# EAGLE board BMS Segment rev15 (EAGLE 9.6.2), part 1 of 2
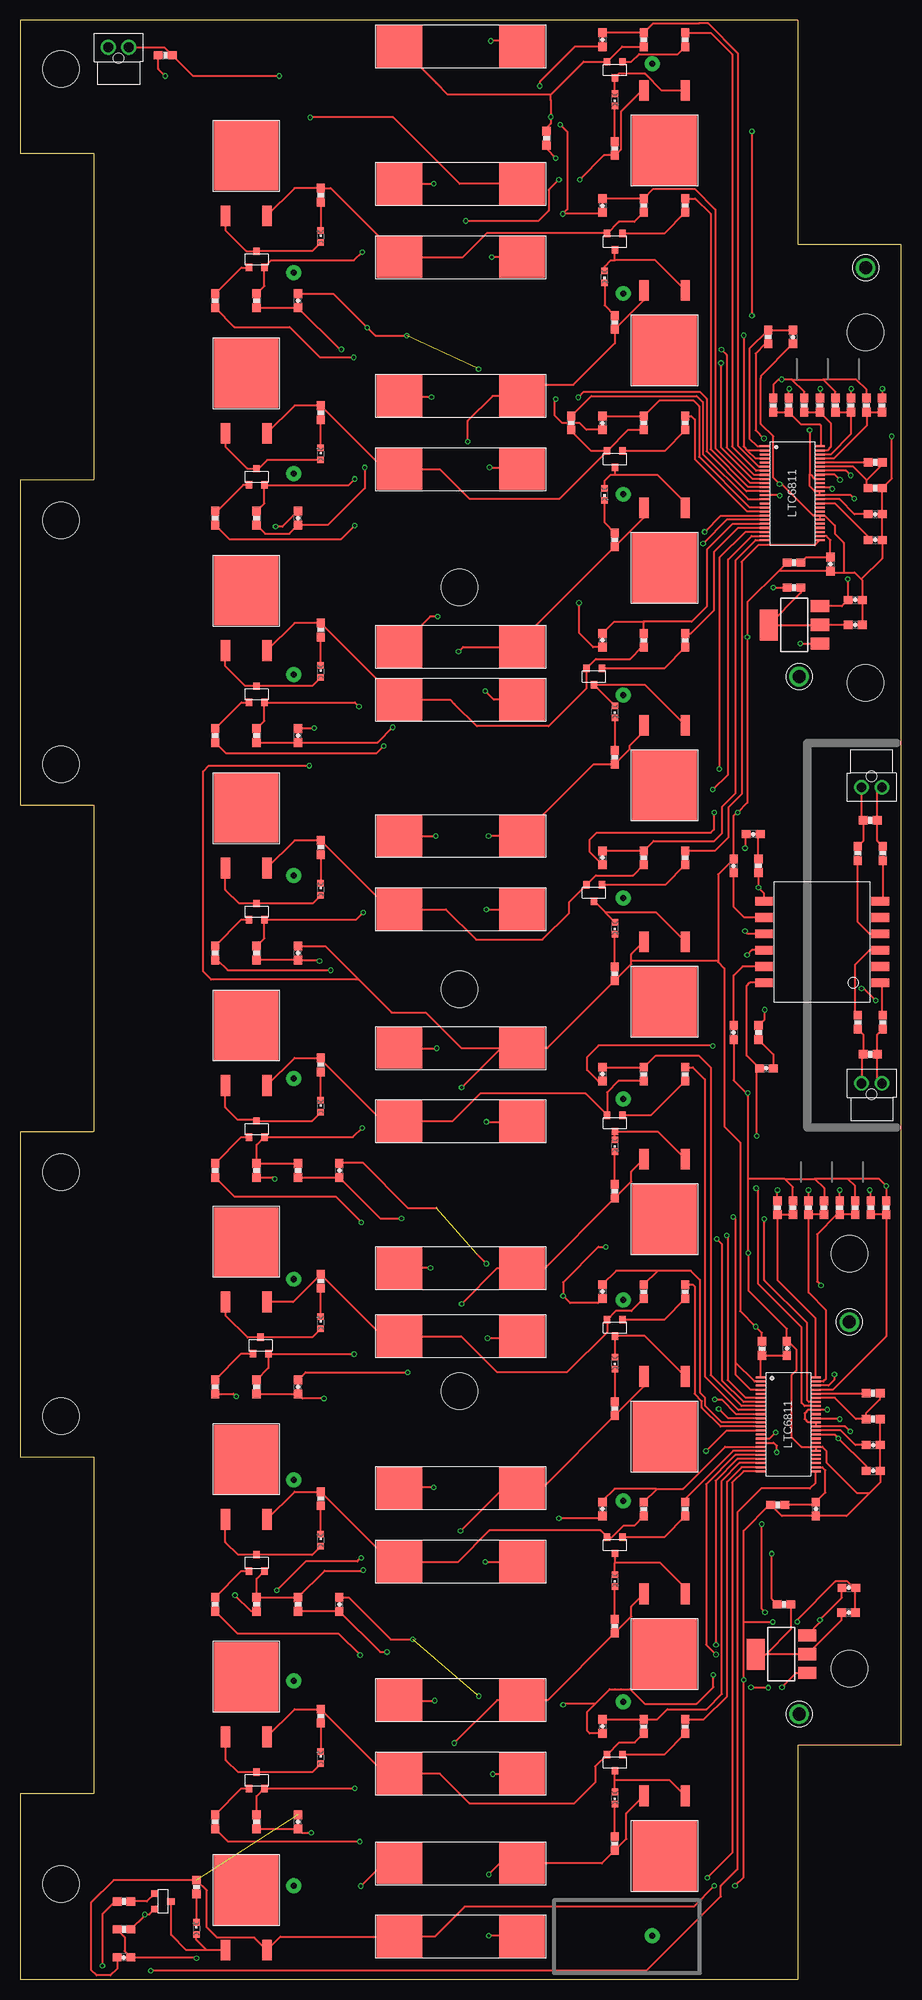
[diagram p0: board, top side]
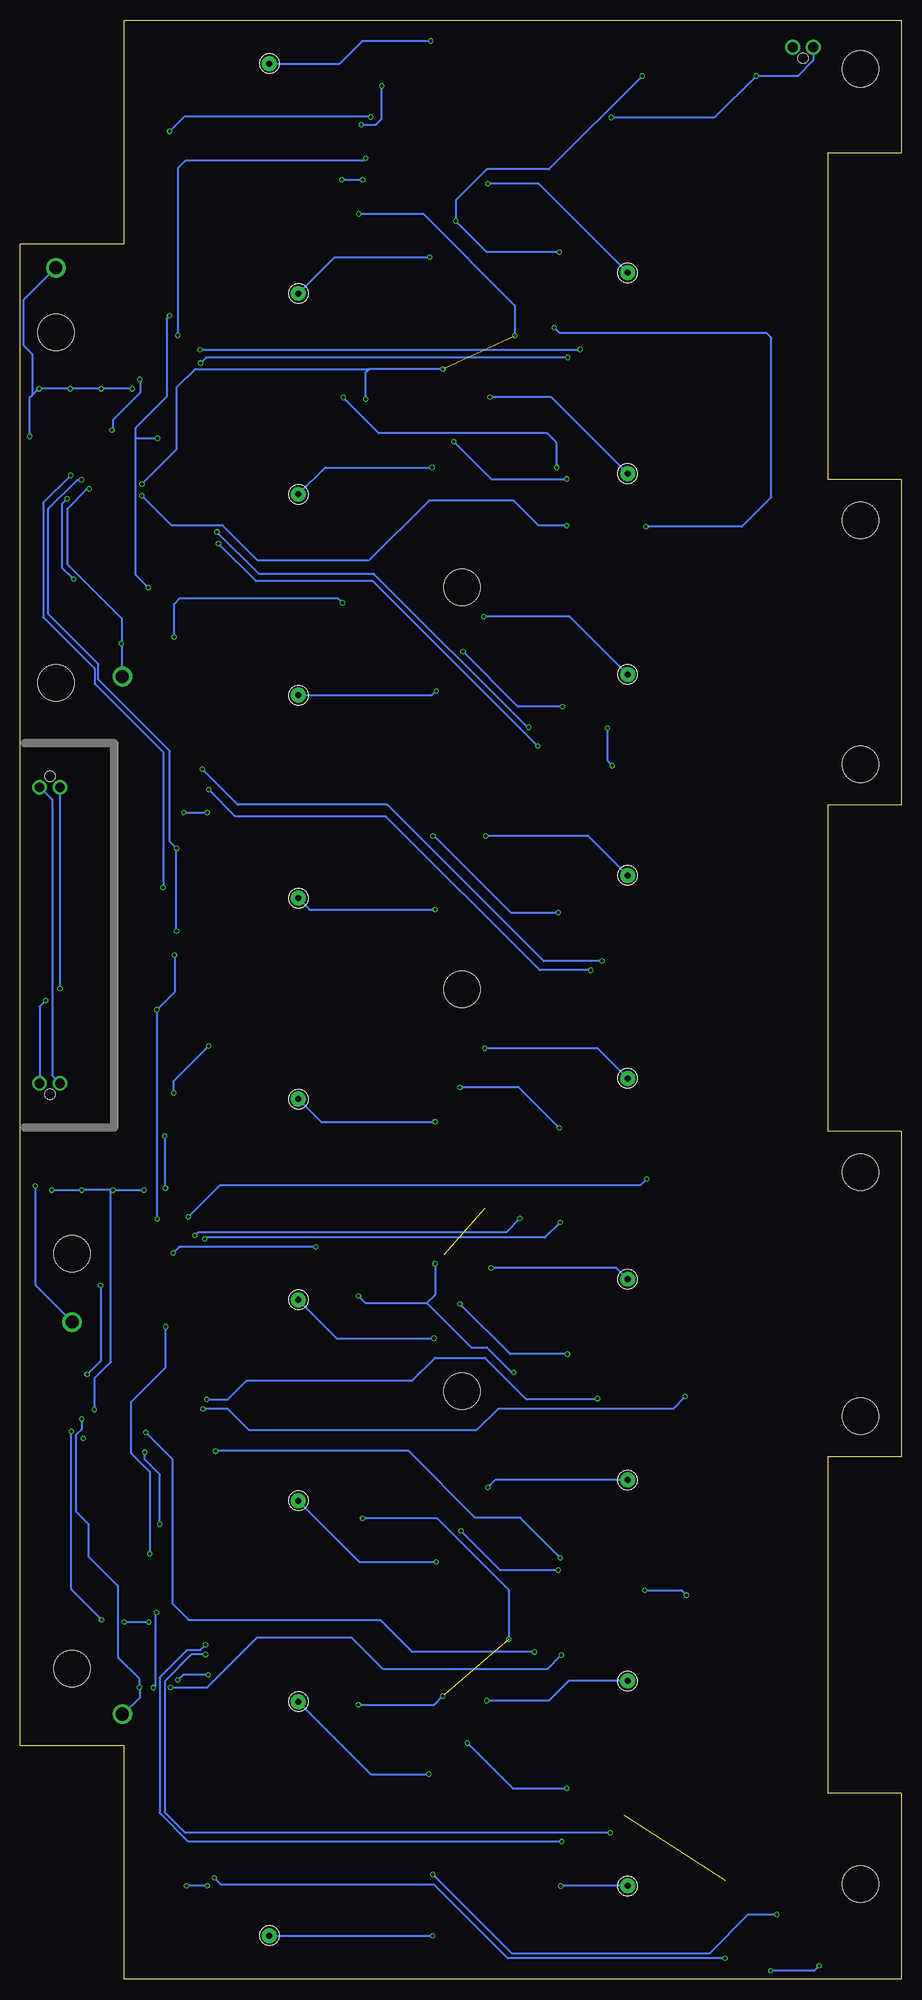
[diagram p1: board, bottom side, seen from below]

Size 108 x 240.25 mm. Coordinates in mm from the lower left corner, seen from the top.
Outline: 9,223.93 9,183.93 0,183.93 0,143.99 9,143.99 9,103.99 0,103.99 0,64.05 9,64.05 9,22.77 0,22.77 0,0 95.3,0 95.3,28.7 108,28.7 108,212.82 95.3,212.82 95.3,240.25 0,240.25 0,223.93 9,223.93
Copper layers (1*16): Top 0.035mm / dielectric 1.5mm / Bottom 0.035mm
Design rules "Advanced Circuits (2 Layer) *": minimum track width 5mil, minimum drill 10mil, track to track 5mil, track to pad 5mil, pad to pad 5mil, via to via 5mil, smd to smd 5mil, copper to edge 10mil, drill to drill 6mil, minimum pad ring 7mil, minimum via ring 5mil, stop-mask expansion 2.5mil, vias tented up to drill 30mil, thermal gap 10mil
Net classes: 1 unfused_hv: clearance 0.025 mm to class 0, clearance 3.2 mm

## Footprints (pad centres in the part's own frame; a part is rotated, then mirrored left to right if it is on the bottom)
NANO-FIT_VERTICAL-2 = drill 1.2: P$1 -1.25,0; P$2 1.25,0 | hole 1.3: 0,-1.34
0603-CAP = smd 1.1 x 1: 1 -0.85,0; 2 0.85,0
CONTACT_SPRING = drill 0.737 pad 1.829: P$1 0,0
PWR163 = smd 1.143 x 2.54: 1 -2.54,-7.366; 2 2.54,-7.366 | smd 7.874 x 8.509: PAD 0,0
0603-RES = smd 1.1 x 1: 1 -0.85,0; 2 0.85,0
LED-603 = smd 0.8 x 0.8: A 0,-0.75; C 0,0.75
SOT23 = smd 0.8 x 0.9: 1 -0.95,-1; 2 0.95,-1; 3 0,1
5X20MM_FUSE = smd 5.588 x 5.08: P$1 -7.493,0; P$2 7.493,0
SOT223 = smd 1.5 x 2.235: 1 -2.3,-3.15; 2 0,-3.15; 3 2.3,-3.15 | smd 3.8 x 2.2: 4 0,3.15
HM2102NLT = smd 1.067 x 2.184: P$1 0,0; P$2 2,0; P$3 4,0; P$4 6,0; P$5 8,0; P$6 10,0; P$7 10,14.25; P$8 8,14.25; P$9 6,14.25; P$10 4,14.25; P$11 2,14.25; P$12 0,14.25
LTC6811 = smd 0.25 x 1.25: 1 -5.75,-3.37; 2 -5.25,-3.37; 3 -4.75,-3.37; 4 -4.25,-3.37; 5 -3.75,-3.37; 6 -3.25,-3.37; 7 -2.75,-3.37; 8 -2.25,-3.37; 9 -1.75,-3.37; 10 -1.25,-3.37; 11 -0.75,-3.37; 12 -0.25,-3.37; 13 0.25,-3.37; 14 0.75,-3.37; 15 1.25,-3.37; 16 1.75,-3.37; 17 2.25,-3.37; 18 2.75,-3.37; 19 3.25,-3.37; 20 3.75,-3.37; 21 4.25,-3.37; 22 4.75,-3.37; 23 5.25,-3.37; 24 5.75,-3.37; 25 5.75,3.38; 26 5.25,3.38; 27 4.75,3.38; 28 4.25,3.38; 29 3.75,3.38; 30 3.25,3.38; 31 2.75,3.38; 32 2.25,3.38; 33 1.75,3.38; 34 1.25,3.38; 35 0.75,3.38; 36 0.25,3.38; 37 -0.25,3.38; 38 -0.75,3.38; 39 -1.25,3.38; 40 -1.75,3.38; 41 -2.25,3.38; 42 -2.75,3.38; 43 -3.25,3.38; 44 -3.75,3.38; 45 -4.25,3.38; 46 -4.75,3.38; 47 -5.25,3.38; 48 -5.75,3.38
TEST_POINT = drill 1.6: P$1 0,0
M4_MOUNTING = hole 4.5: 0,0

## Placement (x,y rotation side)
AMS_CELL_TEST  AMS_CELL_TEST  [NANO-FIT_VERTICAL-2]  12.03,236.95 0 top
C1_A  1uF  [0603-CAP]  104.82,176.52 0 top
C1_B  1uF  [0603-CAP]  104.56,62.34 0 top
C2_A  1uF  [0603-CAP]  104.82,179.69 0 top
C2_B  1uF  [0603-CAP]  104.56,65.52 0 top
C3_A  15pF  [0603-CAP]  89.87,140.45 180 top
C3_B  15pF  [0603-CAP]  91.49,111.7 180 top
C4_A  10nF  [0603-CAP]  87.46,136.55 90 top
C4_B  10nF  [0603-CAP]  87.46,116.11 270 top
C5_A  10nF  [0603-CAP]  99.33,173.54 270 top
C6_A  100nF  [0603-CAP]  94.74,201.42 270 top
C6_B  100nF  [0603-CAP]  93.98,77.34 90 top
C7_A  100nF  [0603-CAP]  102.36,166.12 0 top
C7_B  100nF  [0603-CAP]  101.55,44.96 0 top
C8_A  1uF  [0603-CAP]  102.36,169.16 0 top
C8_B  1uF  [0603-CAP]  101.6,48.01 0 top
C_5  10nF  [0603-CAP]  97.54,57.66 270 top
CELL0  BATTERY_SPRING_SPRING_CONTACT  [CONTACT_SPRING]  77.47,5.33 270 bottom
CELL1  BATTERY_SPRING_SPRING_CONTACT  [CONTACT_SPRING]  33.53,11.43 270 bottom
CELL2  BATTERY_SPRING_SPRING_CONTACT  [CONTACT_SPRING]  73.91,34.04 270 bottom
CELL3  BATTERY_SPRING_SPRING_CONTACT  [CONTACT_SPRING]  33.53,36.58 270 bottom
CELL4  BATTERY_SPRING_SPRING_CONTACT  [CONTACT_SPRING]  73.91,58.67 270 bottom
CELL5  BATTERY_SPRING_SPRING_CONTACT  [CONTACT_SPRING]  33.53,61.21 270 bottom
CELL6  BATTERY_SPRING_SPRING_CONTACT  [CONTACT_SPRING]  73.91,83.31 270 bottom
CELL7  BATTERY_SPRING_SPRING_CONTACT  [CONTACT_SPRING]  33.53,85.85 270 bottom
CELL8  BATTERY_SPRING_SPRING_CONTACT  [CONTACT_SPRING]  73.91,107.95 270 bottom
CELL9  BATTERY_SPRING_SPRING_CONTACT  [CONTACT_SPRING]  33.53,110.49 270 bottom
CELL10  BATTERY_SPRING_SPRING_CONTACT  [CONTACT_SPRING]  73.91,132.59 270 bottom
CELL11  BATTERY_SPRING_SPRING_CONTACT  [CONTACT_SPRING]  33.53,135.38 270 bottom
CELL12  BATTERY_SPRING_SPRING_CONTACT  [CONTACT_SPRING]  73.91,157.48 270 bottom
CELL13  BATTERY_SPRING_SPRING_CONTACT  [CONTACT_SPRING]  33.53,160.02 270 bottom
CELL14  BATTERY_SPRING_SPRING_CONTACT  [CONTACT_SPRING]  73.91,182.12 270 bottom
CELL15  BATTERY_SPRING_SPRING_CONTACT  [CONTACT_SPRING]  33.53,184.66 270 bottom
CELL16  BATTERY_SPRING_SPRING_CONTACT  [CONTACT_SPRING]  73.91,206.76 270 bottom
CELL17  BATTERY_SPRING_SPRING_CONTACT  [CONTACT_SPRING]  33.53,209.3 270 bottom
CELL18  BATTERY_SPRING_SPRING_CONTACT  [CONTACT_SPRING]  77.47,234.95 270 bottom
DRAIN1:C  10nF  [0603-CAP]  12.7,2.67 180 top
DRAIN1:DISCHARGE  5R  [PWR163]  27.69,10.92 0 top
DRAIN1:GATE  3K3  [0603-RES]  12.7,9.53 180 top
DRAIN1:LED1  RED  [LED-603]  21.59,6.22 0 top
DRAIN1:PFET  P-CHANNEL_MOSFET_DMP3099L-7  [SOT23]  17.48,9.53 270 top
DRAIN1:R  100R  [0603-RES]  12.7,6.1 180 top
DRAIN1:R1  806R  [0603-RES]  21.59,11.3 270 top
DRAIN2:C  10nF  [0603-CAP]  71.37,30.99 270 top
DRAIN2:DISCHARGE  5R  [PWR163]  79,15.11 180 top
DRAIN2:GATE  3K3  [0603-RES]  81.53,30.99 90 top
DRAIN2:LED1  RED  [LED-603]  72.9,22.23 180 top
DRAIN2:PFET  P-CHANNEL_MOSFET_DMP3099L-7  [SOT23]  72.9,26.54 180 top
DRAIN2:R  100R  [0603-RES]  76.45,30.99 90 top
DRAIN2:R1  806R  [0603-RES]  72.9,16.64 90 top
DRAIN3:C  10nF  [0603-CAP]  34.04,19.3 90 top
DRAIN3:DISCHARGE  5R  [PWR163]  27.69,37.08 0 top
DRAIN3:GATE  3K3  [0603-RES]  23.88,19.3 270 top
DRAIN3:LED1  RED  [LED-603]  36.83,27.18 0 top
DRAIN3:PFET  P-CHANNEL_MOSFET_DMP3099L-7  [SOT23]  28.96,24.38 0 top
DRAIN3:R  100R  [0603-RES]  28.96,19.3 270 top
DRAIN3:R1  806R  [0603-RES]  36.83,32.26 270 top
DRAIN4:C  10nF  [0603-CAP]  71.37,57.66 270 top
DRAIN4:DISCHARGE  5R  [PWR163]  78.99,39.88 180 top
DRAIN4:GATE  3K3  [0603-RES]  81.53,57.66 90 top
DRAIN4:LED1  RED  [LED-603]  72.9,48.9 180 top
DRAIN4:PFET  P-CHANNEL_MOSFET_DMP3099L-7  [SOT23]  72.9,53.21 180 top
DRAIN4:R  100R  [0603-RES]  76.45,57.66 90 top
DRAIN4:R1  806R  [0603-RES]  72.9,43.31 90 top
DRAIN5:C  10nF  [0603-CAP]  39.12,45.97 90 top
DRAIN5:DISCHARGE  5R  [PWR163]  27.69,63.75 0 top
DRAIN5:GATE  3K3  [0603-RES]  23.88,45.97 270 top
DRAIN5:LED1  RED  [LED-603]  36.83,53.85 0 top
DRAIN5:PFET  P-CHANNEL_MOSFET_DMP3099L-7  [SOT23]  28.96,51.05 0 top
DRAIN5:R  100R  [0603-RES]  34.04,45.97 270 top
DRAIN5:R1  806R  [0603-RES]  36.83,58.93 270 top
DRAIN6:C  10nF  [0603-CAP]  71.37,84.33 270 top
DRAIN6:DISCHARGE  5R  [PWR163]  79,66.55 180 top
DRAIN6:GATE  3K3  [0603-RES]  81.53,84.33 90 top
DRAIN6:LED1  RED  [LED-603]  72.9,75.56 180 top
DRAIN6:PFET  P-CHANNEL_MOSFET_DMP3099L-7  [SOT23]  72.9,79.88 180 top
DRAIN6:R  100R  [0603-RES]  76.45,84.33 90 top
DRAIN6:R1  806R  [0603-RES]  72.9,69.98 90 top
DRAIN7:C  10nF  [0603-CAP]  34.04,72.64 90 top
DRAIN7:DISCHARGE  5R  [PWR163]  27.69,90.42 0 top
DRAIN7:GATE  3K3  [0603-RES]  23.88,72.64 270 top
DRAIN7:LED1  RED  [LED-603]  36.83,80.52 0 top
DRAIN7:PFET  P-CHANNEL_MOSFET_DMP3099L-7  [SOT23]  29.46,77.72 0 top
DRAIN7:R  100R  [0603-RES]  28.96,72.64 270 top
DRAIN7:R1  806R  [0603-RES]  36.83,85.6 270 top
DRAIN8:C  10nF  [0603-CAP]  71.37,111 270 top
DRAIN8:DISCHARGE  5R  [PWR163]  78.99,93.22 180 top
DRAIN8:GATE  3K3  [0603-RES]  81.53,111 90 top
DRAIN8:LED1  RED  [LED-603]  72.9,102.23 180 top
DRAIN8:PFET  P-CHANNEL_MOSFET_DMP3099L-7  [SOT23]  72.9,104.97 180 top
DRAIN8:R  100R  [0603-RES]  76.45,111 90 top
DRAIN8:R1  806R  [0603-RES]  72.9,96.65 90 top
DRAIN9:C  10nF  [0603-CAP]  39.12,99.19 90 top
DRAIN9:DISCHARGE  5R  [PWR163]  27.69,116.97 0 top
DRAIN9:GATE  3K3  [0603-RES]  23.88,99.19 270 top
DRAIN9:LED1  RED  [LED-603]  36.83,107.06 0 top
DRAIN9:PFET  P-CHANNEL_MOSFET_DMP3099L-7  [SOT23]  28.96,104.27 0 top
DRAIN9:R  100R  [0603-RES]  34.04,99.19 270 top
DRAIN9:R1  806R  [0603-RES]  36.83,112.14 270 top
DRAIN10:C  10nF  [0603-CAP]  71.37,137.54 270 top
DRAIN10:DISCHARGE  5R  [PWR163]  78.99,119.89 180 top
DRAIN10:GATE  3K3  [0603-RES]  81.53,137.54 90 top
DRAIN10:LED1  RED  [LED-603]  72.9,128.91 180 top
DRAIN10:PFET  P-CHANNEL_MOSFET_DMP3099L-7  [SOT23]  70.36,133.22 180 top
DRAIN10:R  100R  [0603-RES]  76.45,137.54 90 top
DRAIN10:R1  806R  [0603-RES]  72.9,123.32 90 top
DRAIN11:C  10nF  [0603-CAP]  34.04,125.86 90 top
DRAIN11:DISCHARGE  5R  [PWR163]  27.69,143.64 0 top
DRAIN11:GATE  3K3  [0603-RES]  23.88,125.86 270 top
DRAIN11:LED1  RED  [LED-603]  36.83,133.68 0 top
DRAIN11:PFET  P-CHANNEL_MOSFET_DMP3099L-7  [SOT23]  28.96,130.94 0 top
DRAIN11:R  100R  [0603-RES]  28.96,125.86 270 top
DRAIN11:R1  806R  [0603-RES]  36.83,138.81 270 top
DRAIN12:C  10nF  [0603-CAP]  71.37,164.21 270 top
DRAIN12:DISCHARGE  5R  [PWR163]  78.99,146.43 180 top
DRAIN12:GATE  3K3  [0603-RES]  81.53,164.21 90 top
DRAIN12:LED1  RED  [LED-603]  72.9,155.45 180 top
DRAIN12:PFET  P-CHANNEL_MOSFET_DMP3099L-7  [SOT23]  70.36,159.77 180 top
DRAIN12:R  100R  [0603-RES]  76.45,164.21 90 top
DRAIN12:R1  806R  [0603-RES]  72.9,149.86 90 top
DRAIN13:C  10nF  [0603-CAP]  34.04,152.53 90 top
DRAIN13:DISCHARGE  5R  [PWR163]  27.69,170.31 0 top
DRAIN13:GATE  3K3  [0603-RES]  23.88,152.53 270 top
DRAIN13:LED1  RED  [LED-603]  36.83,160.4 0 top
DRAIN13:PFET  P-CHANNEL_MOSFET_DMP3099L-7  [SOT23]  28.96,157.61 0 top
DRAIN13:R  100R  [0603-RES]  28.96,152.53 270 top
DRAIN13:R1  806R  [0603-RES]  36.83,165.48 270 top
DRAIN14:C  10nF  [0603-CAP]  71.37,190.88 270 top
DRAIN14:DISCHARGE  5R  [PWR163]  78.99,173.1 180 top
DRAIN14:GATE  3K3  [0603-RES]  81.53,190.88 90 top
DRAIN14:LED1  RED  [LED-603]  71.63,182.12 180 top
DRAIN14:PFET  P-CHANNEL_MOSFET_DMP3099L-7  [SOT23]  72.9,186.44 180 top
DRAIN14:R  100R  [0603-RES]  76.45,190.88 90 top
DRAIN14:R1  806R  [0603-RES]  72.9,176.53 90 top
DRAIN15:C  10nF  [0603-CAP]  34.04,179.2 90 top
DRAIN15:DISCHARGE  5R  [PWR163]  27.69,196.98 0 top
DRAIN15:GATE  3K3  [0603-RES]  23.88,179.2 270 top
DRAIN15:LED1  RED  [LED-603]  36.83,187.07 0 top
DRAIN15:PFET  P-CHANNEL_MOSFET_DMP3099L-7  [SOT23]  28.96,184.28 0 top
DRAIN15:R  100R  [0603-RES]  28.96,179.2 270 top
DRAIN15:R1  806R  [0603-RES]  36.83,192.15 270 top
DRAIN16:C  10nF  [0603-CAP]  71.37,217.55 270 top
DRAIN16:DISCHARGE  5R  [PWR163]  78.99,199.77 180 top
DRAIN16:GATE  3K3  [0603-RES]  81.53,217.55 90 top
DRAIN16:LED1  RED  [LED-603]  71.63,208.79 180 top
DRAIN16:PFET  P-CHANNEL_MOSFET_DMP3099L-7  [SOT23]  72.9,213.11 180 top
DRAIN16:R  100R  [0603-RES]  76.45,217.55 90 top
DRAIN16:R1  806R  [0603-RES]  72.9,203.2 90 top
DRAIN17:C  10nF  [0603-CAP]  34.04,205.87 90 top
DRAIN17:DISCHARGE  5R  [PWR163]  27.69,223.65 0 top
DRAIN17:GATE  3K3  [0603-RES]  23.88,205.87 270 top
DRAIN17:LED1  RED  [LED-603]  36.83,213.74 0 top
DRAIN17:PFET  P-CHANNEL_MOSFET_DMP3099L-7  [SOT23]  28.96,210.95 0 top
DRAIN17:R  100R  [0603-RES]  28.96,205.87 270 top
DRAIN17:R1  806R  [0603-RES]  36.83,218.82 270 top
DRAIN18:C  10nF  [0603-CAP]  71.37,237.87 270 top
DRAIN18:DISCHARGE  5R  [PWR163]  78.99,224.28 180 top
DRAIN18:GATE  3K3  [0603-RES]  81.53,237.87 90 top
DRAIN18:LED1  RED  [LED-603]  72.9,230.5 180 top
DRAIN18:PFET  P-CHANNEL_MOSFET_DMP3099L-7  [SOT23]  72.9,234.19 180 top
DRAIN18:R  100R  [0603-RES]  76.45,237.87 90 top
DRAIN18:R1  806R  [0603-RES]  72.9,224.54 90 top
F0  0001.2704.11  [5X20MM_FUSE]  54,5.21 180 top
F1  0001.2704.11  [5X20MM_FUSE]  54,14.21 0 top
F2  0001.2704.11  [5X20MM_FUSE]  54,25.21 180 top
F3  0001.2704.11  [5X20MM_FUSE]  54,34.21 0 top
F4  0001.2704.11  [5X20MM_FUSE]  54,51.21 180 top
F5  0001.2704.11  [5X20MM_FUSE]  54,60.21 0 top
F6  0001.2704.11  [5X20MM_FUSE]  54,78.84 180 top
F7  0001.2704.11  [5X20MM_FUSE]  54,87.21 0 top
F8  0001.2704.11  [5X20MM_FUSE]  54,105.21 180 top
F9  0001.2704.11  [5X20MM_FUSE]  54,114.21 0 top
F10  0001.2704.11  [5X20MM_FUSE]  54,131.21 180 top
F11  0001.2704.11  [5X20MM_FUSE]  54,140.21 0 top
F12  0001.2704.11  [5X20MM_FUSE]  54,156.94 180 top
F13  0001.2704.11  [5X20MM_FUSE]  54,163.4 0 top
F14  0001.2704.11  [5X20MM_FUSE]  54,185.21 180 top
F15  0001.2704.11  [5X20MM_FUSE]  54,194.21 0 top
F16  0001.2704.11  [5X20MM_FUSE]  54,211.21 180 top
F17  0001.2704.11  [5X20MM_FUSE]  54,220.21 0 top
F18  0001.2704.11  [5X20MM_FUSE]  54,237.05 180 top
ISOSPI_A  ISOSPI  [NANO-FIT_VERTICAL-2]  104.39,146.19 180 top
ISOSPI_B  ISOSPI  [NANO-FIT_VERTICAL-2]  104.39,109.87 0 top
J1_A  0R  [0603-RES]  105.66,193.04 90 top
J1_B  0R  [0603-RES]  106.17,94.61 90 top
J2_A  0R  [0603-RES]  103.76,193.04 90 top
J2_B  0R  [0603-RES]  104.27,94.61 90 top
J3_A  0R  [0603-RES]  101.85,193.04 90 top
J3_B  0R  [0603-RES]  102.36,94.61 90 top
J4_A  0R  [0603-RES]  99.95,193.04 90 top
J4_B  0R  [0603-RES]  100.46,94.61 90 top
J5_A  0R  [0603-RES]  98.04,193.04 90 top
J5_B  0R  [0603-RES]  98.55,94.61 90 top
J6_A  0R  [0603-RES]  96.14,193.04 90 top
J6_B  0R  [0603-RES]  96.65,94.61 90 top
J7_A  0R  [0603-RES]  94.23,193.04 90 top
J7_B  0R  [0603-RES]  94.74,94.61 90 top
J8_A  0R  [0603-RES]  92.33,193.04 90 top
J8_B  0R  [0603-RES]  92.84,94.61 90 top
J_CELL_A  0R  [0603-RES]  17.78,235.97 0 top
Q1  NSV1C201MZ4  [SOT223]  94.91,166.1 90 top
Q2  NSV1C201MZ4  [SOT223]  93.32,39.86 90 top
R1_A  100R  [0603-RES]  91.69,201.42 90 top
R1_B  100R  [0603-RES]  90.93,77.34 270 top
R2_A  100R  [0603-RES]  94.87,173.74 0 top
R2_B  100R  [0603-RES]  92.88,58.17 0 top
R3_A  402R  [0603-RES]  90.51,136.55 90 top
R3_B  402R  [0603-RES]  90.51,116.11 270 top
R4_A  22R  [0603-RES]  105.75,138.08 90 top
R4_B  22R  [0603-RES]  102.7,117.38 270 top
R5_A  22R  [0603-RES]  102.7,138.08 90 top
R5_B  22R  [0603-RES]  105.75,117.38 270 top
RB1_A  1K2  [0603-RES]  104.82,186.04 180 top
RB1_B  1K2  [0603-RES]  104.56,71.87 180 top
RB2_A  806R  [0603-RES]  104.82,182.87 180 top
RB2_B  806R  [0603-RES]  104.56,68.69 180 top
RIN_A  100R  [0603-RES]  94.87,170.69 0 top
RIN_B  100R  [0603-RES]  93.64,45.97 0 top
RM_A  100R  [0603-RES]  104.22,142.14 180 top
RM_B  100R  [0603-RES]  104.22,113.44 0 top
RU1_A  100R  [0603-RES]  64.52,225.81 270 top
RU1_B  100R  [0603-RES]  28.96,99.19 270 top
RU2_A  100R  [0603-RES]  67.56,190.88 90 top
RU2_B  100R  [0603-RES]  28.96,45.97 270 top
TRANSFORMER  HM2102NLT  [HM2102NLT]  105.44,122.21 90 top
U1  LTC6811-2  [LTC6811]  94.66,182.26 270 top
U2  LTC6811-2  [LTC6811]  94.15,68.05 270 top
U$5  TEST_POINT  [TEST_POINT]  103.65,209.91 90 top
U$6  TEST_POINT  [TEST_POINT]  101.65,80.6 90 top
U$7  TEST_POINT  [TEST_POINT]  95.5,32.51 0 top
U$8  TEST_POINT  [TEST_POINT]  95.5,159.77 0 top
U$9  [M4_MOUNTING]  53.85,170.69 0 top
U$10  [M4_MOUNTING]  5,178.94 0 top
U$11  [M4_MOUNTING]  5,98.99 0 top
U$12  [M4_MOUNTING]  5,69.05 0 top
U$13  [M4_MOUNTING]  5,11.67 0 top
U$14  [M4_MOUNTING]  101.65,38.11 0 top
U$15  [M4_MOUNTING]  103.65,201.99 0 top
U$16  [M4_MOUNTING]  103.65,158.99 0 top
U$17  [M4_MOUNTING]  101.65,88.99 0 top
U$18  [M4_MOUNTING]  53.85,72.14 0 top
U$19  [M4_MOUNTING]  53.85,121.41 0 top
U$26  [M4_MOUNTING]  5,234.28 0 top
U$27  [M4_MOUNTING]  5,148.99 0 top

## Library data of the parts
AMS_CELL_TEST CELL0 CELL1-CELL18 DRAIN1:PFET DRAIN2:PFET DRAIN3:PFET DRAIN4:PFET DRAIN5:PFET DRAIN6:PFET DRAIN7:PFET DRAIN8:PFET DRAIN9:PFET DRAIN10:PFET DRAIN11:PFET DRAIN12:PFET DRAIN13:PFET DRAIN14:PFET DRAIN15:PFET DRAIN16:PFET DRAIN17:PFET DRAIN18:PFET ISOSPI_A ISOSPI_B Q1 Q2 TRANSFORMER U1 U2 U$5-U$19 U$26 U$27 = HyTechDevices
C1_A C1_B C2_A C2_B C3_A C3_B C4_A C4_B C5_A C8_A C8_B C_5 DRAIN1:C DRAIN2:C DRAIN3:C DRAIN4:C DRAIN5:C DRAIN6:C DRAIN7:C DRAIN8:C DRAIN9:C DRAIN10:C DRAIN11:C DRAIN12:C DRAIN13:C DRAIN14:C DRAIN15:C DRAIN16:C DRAIN17:C DRAIN18:C = HyTechDevices; TOLERANCE: 5%; VOLTAGE: 10V
C6_A C6_B C7_A C7_B = HyTechDevices; TOLERANCE: 5%; VOLTAGE: 50V
DRAIN1:DISCHARGE DRAIN2:DISCHARGE DRAIN3:DISCHARGE DRAIN4:DISCHARGE DRAIN5:DISCHARGE DRAIN6:DISCHARGE DRAIN7:DISCHARGE DRAIN8:DISCHARGE DRAIN9:DISCHARGE DRAIN10:DISCHARGE DRAIN11:DISCHARGE DRAIN12:DISCHARGE DRAIN13:DISCHARGE DRAIN14:DISCHARGE DRAIN15:DISCHARGE DRAIN16:DISCHARGE DRAIN17:DISCHARGE DRAIN18:DISCHARGE = HyTechDevices; TOLERANCE: 5%
DRAIN1:GATE DRAIN1:R DRAIN1:R1 DRAIN2:GATE DRAIN2:R DRAIN2:R1 DRAIN3:GATE DRAIN3:R DRAIN3:R1 DRAIN4:GATE DRAIN4:R DRAIN4:R1 DRAIN5:GATE DRAIN5:R DRAIN5:R1 DRAIN6:GATE DRAIN6:R DRAIN6:R1 DRAIN7:GATE DRAIN7:R DRAIN7:R1 DRAIN8:GATE DRAIN8:R DRAIN8:R1 DRAIN9:GATE DRAIN9:R DRAIN9:R1 DRAIN10:GATE DRAIN10:R DRAIN10:R1 DRAIN11:GATE DRAIN11:R DRAIN11:R1 DRAIN12:GATE DRAIN12:R DRAIN12:R1 DRAIN13:GATE DRAIN13:R DRAIN13:R1 DRAIN14:GATE DRAIN14:R DRAIN14:R1 DRAIN15:GATE DRAIN15:R DRAIN15:R1 DRAIN16:GATE DRAIN16:R DRAIN16:R1 DRAIN17:GATE DRAIN17:R DRAIN17:R1 DRAIN18:GATE DRAIN18:R DRAIN18:R1 J1_A J1_B J2_A J2_B J3_A J3_B J4_A J4_B J5_A J5_B J6_A J6_B J7_A J7_B J8_A J8_B R1_A R1_B R2_A R2_B R3_A R3_B R4_A R4_B R5_A R5_B RB1_A RB1_B RB2_A RB2_B RIN_A RIN_B RU1_A RU1_B RU2_A RU2_B = HyTechDevices; TOLERANCE: 1%
DRAIN1:LED1 DRAIN2:LED1 DRAIN3:LED1 DRAIN4:LED1 DRAIN5:LED1 DRAIN6:LED1 DRAIN7:LED1 DRAIN8:LED1 DRAIN9:LED1 DRAIN10:LED1 DRAIN11:LED1 DRAIN12:LED1 DRAIN13:LED1 DRAIN14:LED1 DRAIN15:LED1 DRAIN16:LED1 DRAIN17:LED1 DRAIN18:LED1 = HyTechDevices; DKPN: 350-2038-1-ND
F0 F1-F18 = HyTechDevices; RATING: 1A
J_CELL_A = HyTechDevices; TOLERANCE: 1%; TYPE: JUMPER
RM_A RM_B = HyTechDevices; TOLERANCE: 1%; TYPE: TERMINATION

## Nets
C0_A: C5_A.1 R2_A.2 U1.26
C0_B: C_5.1 R2_B.2 U2.26
C1_A: DRAIN10:C.1 DRAIN10:R.2 U1.24
C1_B: DRAIN1:C.1 DRAIN1:R.2 U2.24
C2_A: DRAIN11:C.1 DRAIN11:R.2 U1.22
C2_B: DRAIN2:C.1 DRAIN2:R.2 U2.22
C3_A: DRAIN12:C.1 DRAIN12:R.2 U1.20
C3_B: DRAIN3:C.1 DRAIN3:R.2 U2.20
C4_A: DRAIN13:C.1 DRAIN13:R.2 U1.18
C4_B: DRAIN4:C.1 DRAIN4:R.2 U2.18
C5_A: DRAIN14:C.1 DRAIN14:R.2 U1.16
C5_B: DRAIN5:C.1 DRAIN5:R.2 U2.16
C7_A: DRAIN15:C.1 DRAIN15:R.2 U1.12
C7_B: DRAIN6:C.1 DRAIN6:R.2 U2.12
C8_A: DRAIN16:C.1 DRAIN16:R.2 U1.10
C8_B: DRAIN7:C.1 DRAIN7:R.2 U2.10
C9_A: DRAIN17:C.1 DRAIN17:R.2 U1.8
C9_B: DRAIN8:C.1 DRAIN8:R.2 U2.8
C10_A: DRAIN18:C.1 DRAIN18:R.2 U1.6
C10_B: DRAIN9:C.1 DRAIN9:R.2 U2.6
CC0 [unfused_hv]: CELL0.P$1 F0.P$1
CC1 [unfused_hv]: CELL1.P$1 F1.P$1
CC2 [unfused_hv]: CELL2.P$1 F2.P$1
CC3 [unfused_hv]: CELL3.P$1 F3.P$1
CC4 [unfused_hv]: CELL4.P$1 F4.P$1
CC5 [unfused_hv]: CELL5.P$1 F5.P$1
CC6 [unfused_hv]: CELL6.P$1 F6.P$1
CC7 [unfused_hv]: CELL7.P$1 F7.P$1
CC8 [unfused_hv]: CELL8.P$1 F8.P$1
CC9 [unfused_hv]: CELL9.P$1 F9.P$1
CC10 [unfused_hv]: CELL10.P$1 F10.P$1
CC11 [unfused_hv]: CELL11.P$1 F11.P$1
CC12 [unfused_hv]: CELL12.P$1 F12.P$1
CC13 [unfused_hv]: CELL13.P$1 F13.P$1
CC14 [unfused_hv]: CELL14.P$1 F14.P$1
CC15 [unfused_hv]: CELL15.P$1 F15.P$1
CC16 [unfused_hv]: CELL16.P$1 F16.P$1
CC17 [unfused_hv]: CELL17.P$1 F17.P$1
CC18 [unfused_hv]: CELL18.P$1 F18.P$1
DRAIN1:GATE: DRAIN1:GATE.1 DRAIN1:PFET.1
DRAIN1:N$1: DRAIN1:DISCHARGE.1 DRAIN1:LED1.A DRAIN1:PFET.3
DRAIN1:N$2: DRAIN1:LED1.C DRAIN1:R1.2
DRAIN2:GATE: DRAIN2:GATE.1 DRAIN2:PFET.1
DRAIN2:N$1: DRAIN2:DISCHARGE.1 DRAIN2:LED1.A DRAIN2:PFET.3
DRAIN2:N$2: DRAIN2:LED1.C DRAIN2:R1.2
DRAIN3:GATE: DRAIN3:GATE.1 DRAIN3:PFET.1
DRAIN3:N$1: DRAIN3:DISCHARGE.1 DRAIN3:LED1.A DRAIN3:PFET.3
DRAIN3:N$2: DRAIN3:LED1.C DRAIN3:R1.2
DRAIN4:GATE: DRAIN4:GATE.1 DRAIN4:PFET.1
DRAIN4:N$1: DRAIN4:DISCHARGE.1 DRAIN4:LED1.A DRAIN4:PFET.3
DRAIN4:N$2: DRAIN4:LED1.C DRAIN4:R1.2
DRAIN5:GATE: DRAIN5:GATE.1 DRAIN5:PFET.1
DRAIN5:N$1: DRAIN5:DISCHARGE.1 DRAIN5:LED1.A DRAIN5:PFET.3
DRAIN5:N$2: DRAIN5:LED1.C DRAIN5:R1.2
DRAIN6:GATE: DRAIN6:GATE.1 DRAIN6:PFET.1
DRAIN6:N$1: DRAIN6:DISCHARGE.1 DRAIN6:LED1.A DRAIN6:PFET.3
DRAIN6:N$2: DRAIN6:LED1.C DRAIN6:R1.2
DRAIN7:GATE: DRAIN7:GATE.1 DRAIN7:PFET.1
DRAIN7:N$1: DRAIN7:DISCHARGE.1 DRAIN7:LED1.A DRAIN7:PFET.3
DRAIN7:N$2: DRAIN7:LED1.C DRAIN7:R1.2
DRAIN8:GATE: DRAIN8:GATE.1 DRAIN8:PFET.1
DRAIN8:N$1: DRAIN8:DISCHARGE.1 DRAIN8:LED1.A DRAIN8:PFET.3
DRAIN8:N$2: DRAIN8:LED1.C DRAIN8:R1.2
DRAIN9:GATE: DRAIN9:GATE.1 DRAIN9:PFET.1
DRAIN9:N$1: DRAIN9:DISCHARGE.1 DRAIN9:LED1.A DRAIN9:PFET.3
DRAIN9:N$2: DRAIN9:LED1.C DRAIN9:R1.2
DRAIN10:GATE: DRAIN10:GATE.1 DRAIN10:PFET.1
DRAIN10:N$1: DRAIN10:DISCHARGE.1 DRAIN10:LED1.A DRAIN10:PFET.3
DRAIN10:N$2: DRAIN10:LED1.C DRAIN10:R1.2
DRAIN11:GATE: DRAIN11:GATE.1 DRAIN11:PFET.1
DRAIN11:N$1: DRAIN11:DISCHARGE.1 DRAIN11:LED1.A DRAIN11:PFET.3
DRAIN11:N$2: DRAIN11:LED1.C DRAIN11:R1.2
DRAIN12:GATE: DRAIN12:GATE.1 DRAIN12:PFET.1
DRAIN12:N$1: DRAIN12:DISCHARGE.1 DRAIN12:LED1.A DRAIN12:PFET.3
DRAIN12:N$2: DRAIN12:LED1.C DRAIN12:R1.2
DRAIN13:GATE: DRAIN13:GATE.1 DRAIN13:PFET.1
DRAIN13:N$1: DRAIN13:DISCHARGE.1 DRAIN13:LED1.A DRAIN13:PFET.3
DRAIN13:N$2: DRAIN13:LED1.C DRAIN13:R1.2
DRAIN14:GATE: DRAIN14:GATE.1 DRAIN14:PFET.1
DRAIN14:N$1: DRAIN14:DISCHARGE.1 DRAIN14:LED1.A DRAIN14:PFET.3
DRAIN14:N$2: DRAIN14:LED1.C DRAIN14:R1.2
DRAIN15:GATE: DRAIN15:GATE.1 DRAIN15:PFET.1
DRAIN15:N$1: DRAIN15:DISCHARGE.1 DRAIN15:LED1.A DRAIN15:PFET.3
DRAIN15:N$2: DRAIN15:LED1.C DRAIN15:R1.2
DRAIN16:GATE: DRAIN16:GATE.1 DRAIN16:PFET.1
DRAIN16:N$1: DRAIN16:DISCHARGE.1 DRAIN16:LED1.A DRAIN16:PFET.3
DRAIN16:N$2: DRAIN16:LED1.C DRAIN16:R1.2
DRAIN17:GATE: DRAIN17:GATE.1 DRAIN17:PFET.1
DRAIN17:N$1: DRAIN17:DISCHARGE.1 DRAIN17:LED1.A DRAIN17:PFET.3
DRAIN17:N$2: DRAIN17:LED1.C DRAIN17:R1.2
DRAIN18:GATE: DRAIN18:GATE.1 DRAIN18:PFET.1
DRAIN18:N$1: DRAIN18:DISCHARGE.1 DRAIN18:LED1.A DRAIN18:PFET.3
DRAIN18:N$2: DRAIN18:LED1.C DRAIN18:R1.2
DRIVE_A: Q1.1 U1.38 U$8.P$1
DRIVE_B: Q2.1 U2.38 U$7.P$1
GPIO1_A: U1.27
GPIO1_B: U2.27
GPIO2_A: U1.28
GPIO2_B: U2.28
GPIO3_A_POST: U1.29
GPIO3_B: U2.29
GPIO4_A: U1.32
GPIO4_B: U2.32
GPIO5_A: U1.33
GPIO5_B: U2.33
IM_A: C3_A.2 TRANSFORMER.P$9 U1.41
IM_B: C3_B.2 TRANSFORMER.P$12 U2.41
IP_A: R3_A.1 TRANSFORMER.P$7 U1.42
IP_B: R3_B.1 TRANSFORMER.P$10 U2.42
ISOSPI-M: ISOSPI_A.P$2 ISOSPI_B.P$2 R5_A.2 R5_B.2 RM_A.2 RM_B.2
ISOSPI-P: ISOSPI_A.P$1 ISOSPI_B.P$1 R4_A.2 R4_B.2 RM_A.1 RM_B.1
N$1: C4_B.1 TRANSFORMER.P$11
N$2: RB1_B.2 U2.44
N$4: RB1_B.1 RB2_B.2 U2.43
N$5: R4_B.1 TRANSFORMER.P$3
N$6: RB1_A.2 U1.44
N$7: R5_B.1 TRANSFORMER.P$1
N$8: J7_B.1 J8_B.1 U2.48
N$9: J5_B.1 J6_B.1 U2.47
N$10: C3_B.1 R3_B.2
N$13: J3_B.1 J4_B.1 U2.46
N$16: J1_B.1 J2_B.1 U2.45
N$20: RB1_A.1 RB2_A.2 U1.43
N$21: C4_A.1 TRANSFORMER.P$8
N$22: R4_A.1 TRANSFORMER.P$6
N$23: R5_A.1 TRANSFORMER.P$4
N$24: C3_A.1 R3_A.2
N$30: J7_A.1 J8_A.1 U1.48
N$31: J5_A.1 J6_A.1 U1.47
N$32: J3_A.1 J4_A.1 U1.46
N$33: J1_A.1 J2_A.1 U1.45
S1_A: DRAIN10:GATE.2 U1.25
S1_B: DRAIN1:GATE.2 U2.25
S2_A: DRAIN11:GATE.2 U1.23
S2_B: DRAIN2:GATE.2 U2.23
S3_A: DRAIN12:GATE.2 U1.21
S3_B: DRAIN3:GATE.2 U2.21
S4_A: DRAIN13:GATE.2 U1.19
S4_B: DRAIN4:GATE.2 U2.19
S5_A: DRAIN14:GATE.2 U1.17
S5_B: DRAIN5:GATE.2 U2.17
S7_A: DRAIN15:GATE.2 U1.13
S7_B: DRAIN6:GATE.2 U2.13
S8_A: DRAIN16:GATE.2 U1.11
S8_B: DRAIN7:GATE.2 U2.11
S9_A: DRAIN17:GATE.2 U1.9
S9_B: DRAIN8:GATE.2 U2.9
S10_A: DRAIN18:GATE.2 U1.7
S10_B: DRAIN9:GATE.2 U2.7
SENSE1: DRAIN1:PFET.2 DRAIN1:R.1 DRAIN2:DISCHARGE.2 DRAIN2:R1.1 F1.P$2
SENSE2: DRAIN2:PFET.2 DRAIN2:R.1 DRAIN3:DISCHARGE.2 DRAIN3:R1.1 F2.P$2
SENSE3: DRAIN3:PFET.2 DRAIN3:R.1 DRAIN4:DISCHARGE.2 DRAIN4:R1.1 F3.P$2
SENSE4: DRAIN4:PFET.2 DRAIN4:R.1 DRAIN5:DISCHARGE.2 DRAIN5:R1.1 F4.P$2
SENSE5: DRAIN5:PFET.2 DRAIN5:R.1 DRAIN6:DISCHARGE.2 DRAIN6:R1.1 F5.P$2 RU2_B.1
SENSE6: DRAIN6:PFET.2 DRAIN6:R.1 DRAIN7:DISCHARGE.2 DRAIN7:R1.1 F6.P$2
SENSE7: DRAIN7:PFET.2 DRAIN7:R.1 DRAIN8:DISCHARGE.2 DRAIN8:R1.1 F7.P$2
SENSE8: DRAIN8:PFET.2 DRAIN8:R.1 DRAIN9:DISCHARGE.2 DRAIN9:R1.1 F8.P$2
SENSE10: DRAIN10:PFET.2 DRAIN10:R.1 DRAIN11:DISCHARGE.2 DRAIN11:R1.1 F10.P$2
SENSE11: DRAIN11:PFET.2 DRAIN11:R.1 DRAIN12:DISCHARGE.2 DRAIN12:R1.1 F11.P$2
SENSE12: DRAIN12:PFET.2 DRAIN12:R.1 DRAIN13:DISCHARGE.2 DRAIN13:R1.1 F12.P$2
SENSE13: DRAIN13:PFET.2 DRAIN13:R.1 DRAIN14:DISCHARGE.2 DRAIN14:R1.1 F13.P$2
SENSE14: DRAIN14:PFET.2 DRAIN14:R.1 DRAIN15:DISCHARGE.2 DRAIN15:R1.1 F14.P$2 RU2_A.1
SENSE15: DRAIN15:PFET.2 DRAIN15:R.1 DRAIN16:DISCHARGE.2 DRAIN16:R1.1 F15.P$2
SENSE16: DRAIN16:PFET.2 DRAIN16:R.1 DRAIN17:DISCHARGE.2 DRAIN17:R1.1 F16.P$2
SENSE17_POST: AMS_CELL_TEST.P$2 DRAIN17:PFET.2 DRAIN17:R.1 DRAIN18:DISCHARGE.2 DRAIN18:R1.1 J_CELL_A.2
SENSE17_PRE: AMS_CELL_TEST.P$1 F17.P$2 J_CELL_A.1
SENSE18: DRAIN18:PFET.2 DRAIN18:R.1 F18.P$2 R1_A.1 RIN_A.1 RU1_A.1
UNUSED1_A: RU1_A.2 U1.2 U1.4
UNUSED1_B: RU1_B.2 U2.2 U2.4
UNUSED2_A: RU2_A.2 U1.14
UNUSED2_B: RU2_B.2 U2.14
V+_A: C6_A.1 R1_A.2 U1.1
V+_B: C6_B.1 R1_B.2 U2.1
V-_A: C1_A.2 C2_A.2 C4_A.2 C5_A.2 C6_A.2 C7_A.2 C8_A.2 DRAIN9:PFET.2 DRAIN9:R.1 DRAIN10:C.2 DRAIN10:DISCHARGE.2 DRAIN10:R1.1 DRAIN11:C.2 DRAIN12:C.2 DRAIN13:C.2 DRAIN14:C.2 DRAIN15:C.2 DRAIN16:C.2 DRAIN17:C.2 DRAIN18:C.2 F9.P$2 J1_A.2 J3_A.2 J5_A.2 J7_A.2 R1_B.1 R2_A.1 RB2_A.1 RIN_B.1 RU1_B.1 U1.30 U1.31 U$5.P$1
V-_B: C1_B.2 C2_B.2 C4_B.2 C6_B.2 C7_B.2 C8_B.2 C_5.2 DRAIN1:C.2 DRAIN1:DISCHARGE.2 DRAIN1:R1.1 DRAIN2:C.2 DRAIN3:C.2 DRAIN4:C.2 DRAIN5:C.2 DRAIN6:C.2 DRAIN7:C.2 DRAIN8:C.2 DRAIN9:C.2 F0.P$2 J1_B.2 J3_B.2 J5_B.2 J7_B.2 R2_B.1 RB2_B.1 U2.30 U2.31 U$6.P$1
VIN_A: C7_A.1 Q1.2 Q1.4 RIN_A.2
VIN_B: C7_B.1 Q2.2 Q2.4 RIN_B.2
VREF1_A: C2_A.1 U1.35
VREF1_B: C2_B.1 U2.35
VREF2_A: C1_A.1 U1.34
VREF2_B: C1_B.1 U2.34
VREG_A: C8_A.1 J2_A.2 J4_A.2 J6_A.2 J8_A.2 Q1.3 U1.36 U1.37 U1.40
VREG_B: C8_B.1 J2_B.2 J4_B.2 J6_B.2 J8_B.2 Q2.3 U2.36 U2.37 U2.40